# Altium PCB 菠萝万能控V4.0.pcbdoc
Units mil, origin at the board's own origin, x right, y up, seen from the top; angles counter-clockwise.
Board outline 4080.87 x 4159.61 mil, 2 copper layers (Top Layer, Bottom Layer); 8 components, 30 nets, 79 pads, 0 vias.
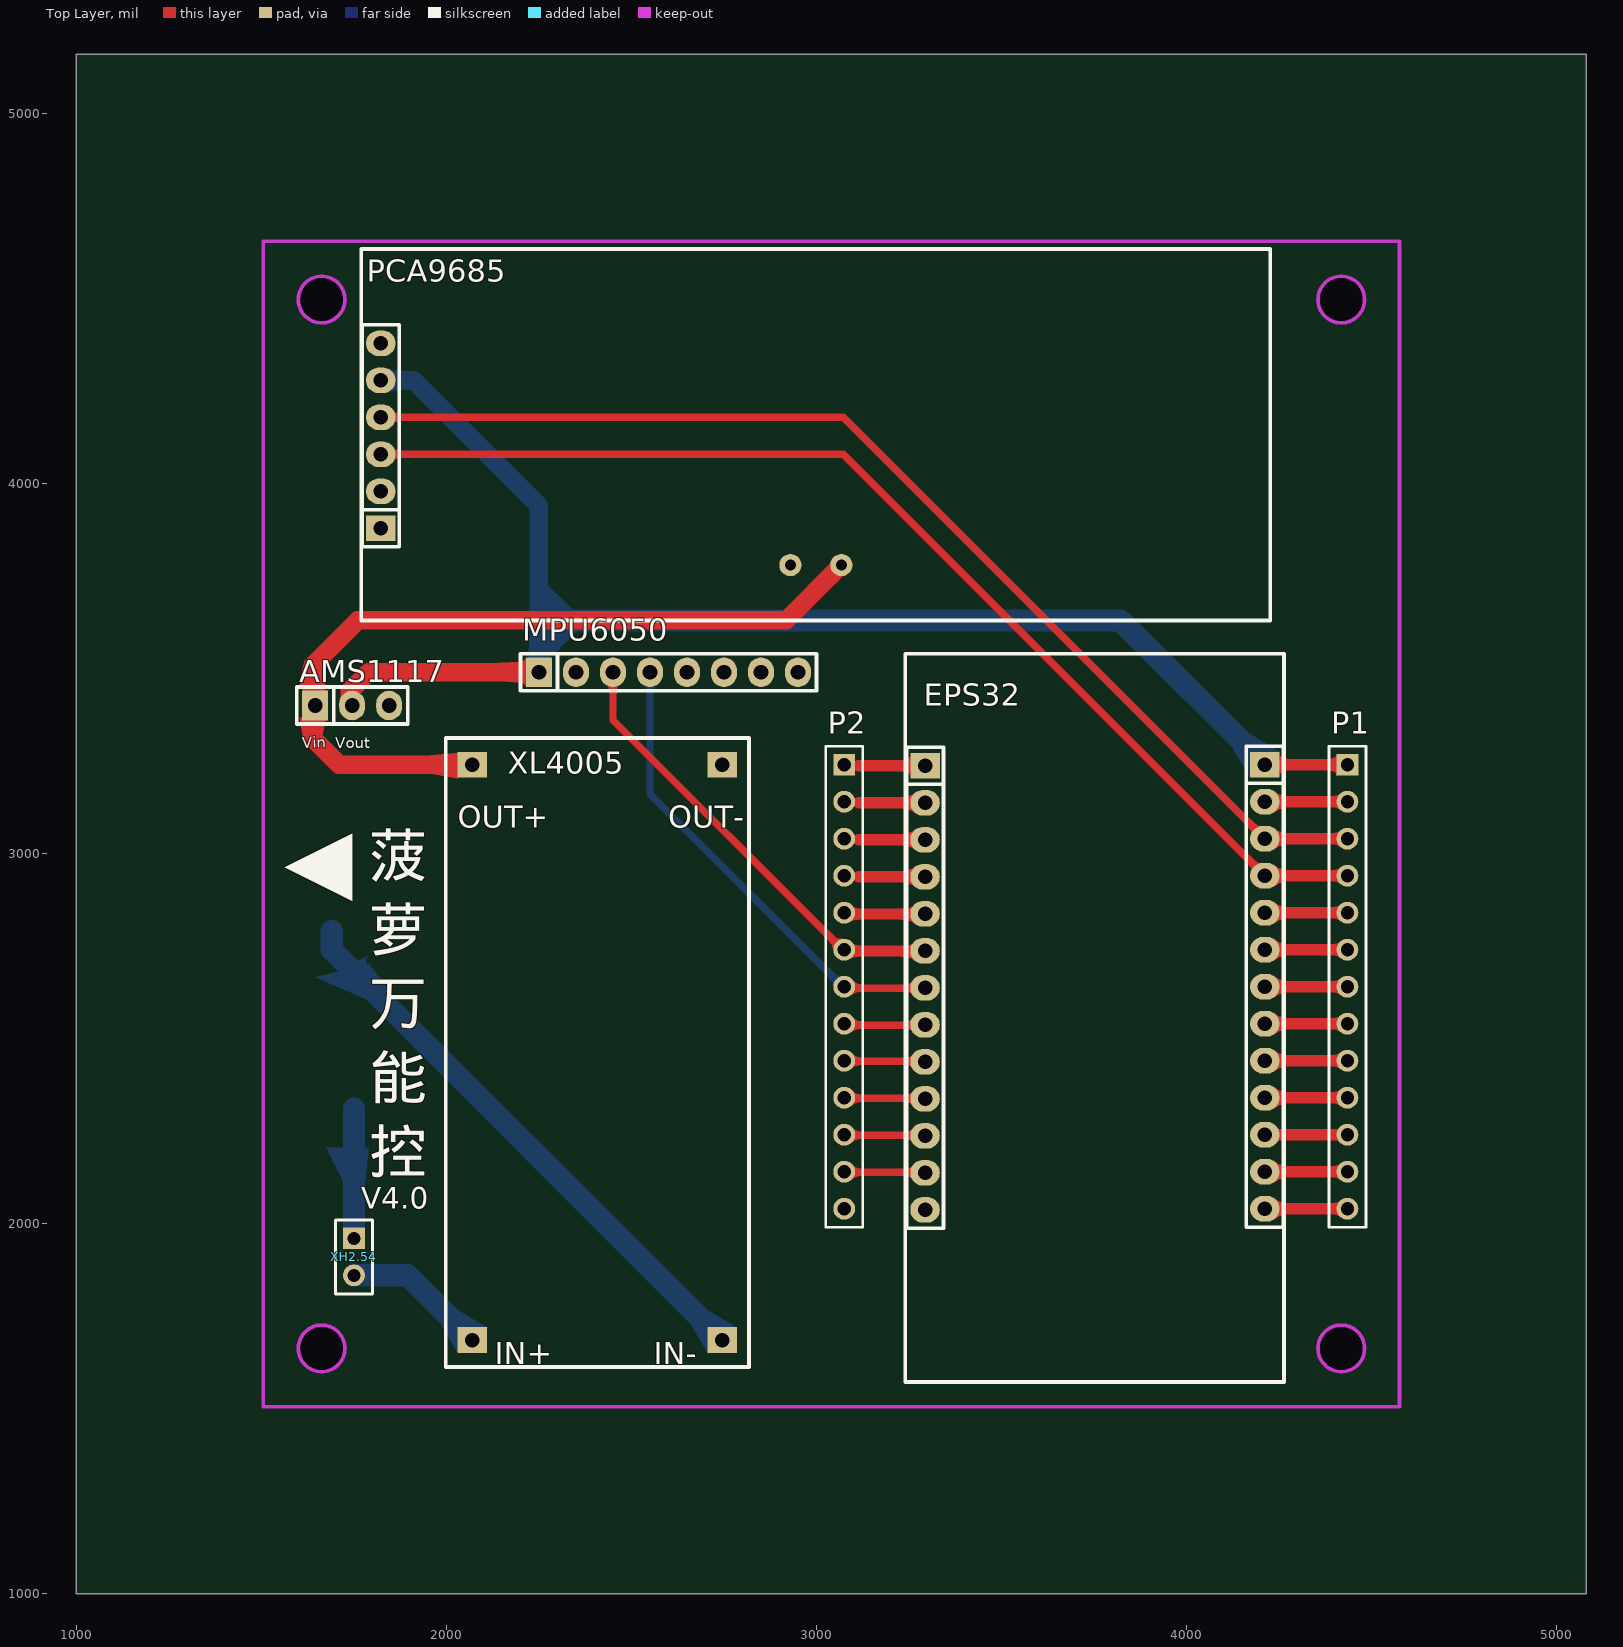
[diagram p0: Top Layer view]
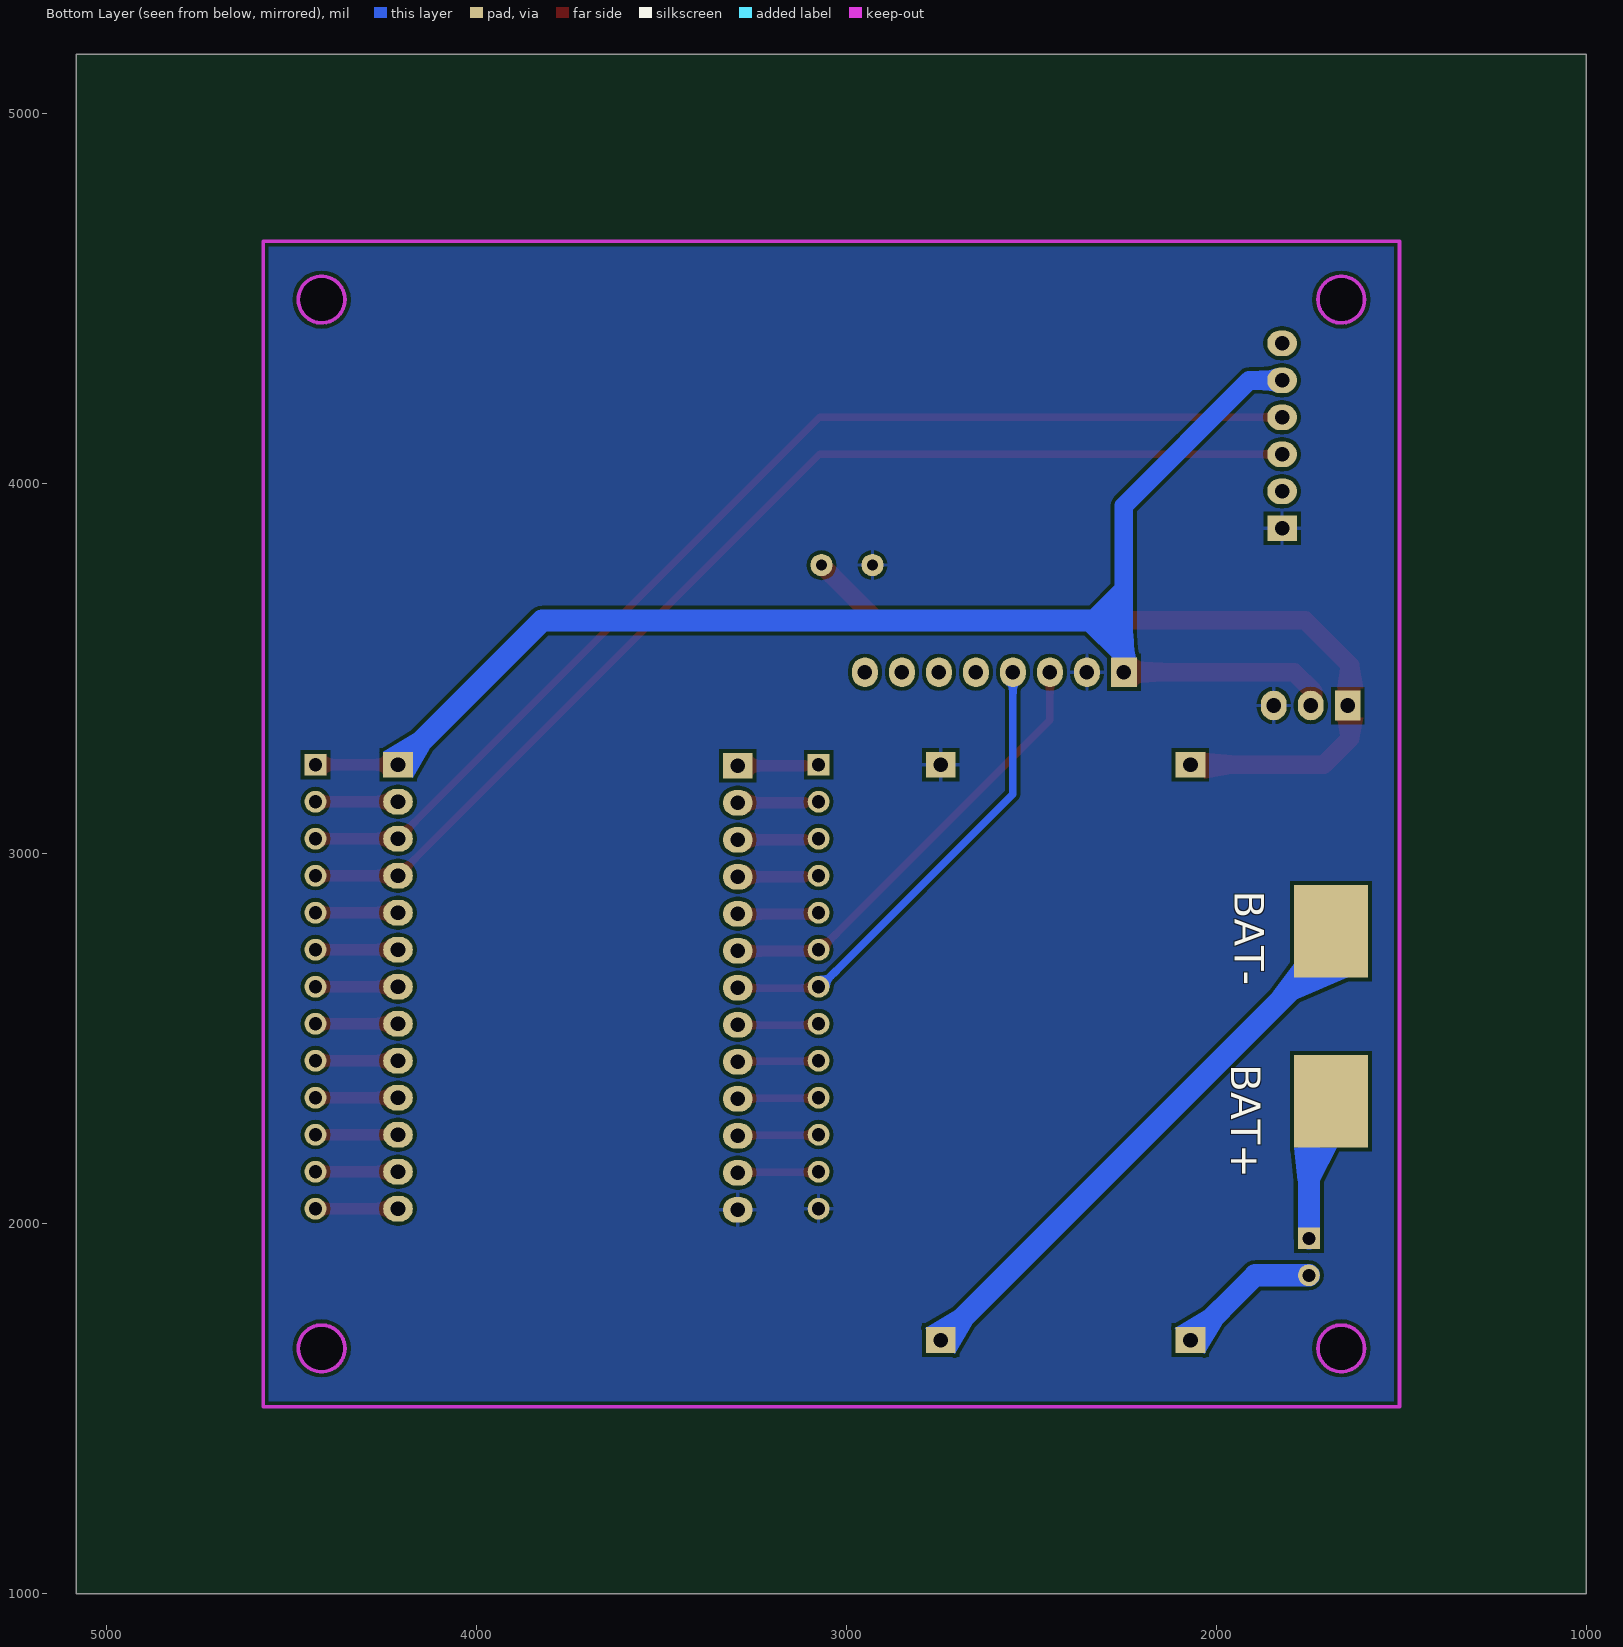
[diagram p1: Bottom Layer view, seen from below]

## Layer stack, top to bottom
Top Solder: solder mask 0.4, Solder Resist, Dk 3.5
Top Layer: signal copper 1.4
Dielectric1: dielectric 12.6, FR-4, Dk 4.8
Bottom Layer: signal copper 1.4
Bottom Solder: solder mask 0.4, Solder Resist, Dk 3.5

## Board outline
5080.87,1000 1000,1000 1000,5159.61 5080.87,5159.61
cut-out: 4418.39,4434.13 4408.53,4434.91 4398.92,4437.22 4389.79,4441 4381.36,4446.16 4373.84,4452.58 4367.42,4460.1 4362.26,4468.53 4358.48,4477.66 4356.17,4487.27 4355.39,4497.13 4356.17,4506.98 4358.48,4516.59 4362.26,4525.72 4367.42,4534.15 4373.84,4541.67 4381.36,4548.09 4389.79,4553.25 4398.92,4557.03 4408.53,4559.34 4418.39,4560.12 4428.24,4559.34 4437.85,4557.03 4446.98,4553.25 4455.41,4548.09 4462.93,4541.67 4469.35,4534.15 4474.51,4525.72 4478.29,4516.59 4480.6,4506.98 4481.38,4497.13 4480.6,4487.27 4478.29,4477.66 4474.51,4468.53 4469.35,4460.1 4462.93,4452.58 4455.41,4446.16 4446.98,4441 4437.85,4437.22 4428.24,4434.91
cut-out: 4355.39,1662.48 4356.17,1652.63 4358.48,1643.01 4362.26,1633.88 4367.42,1625.45 4373.84,1617.94 4381.36,1611.52 4389.79,1606.35 4398.92,1602.57 4408.53,1600.26 4418.39,1599.49 4428.24,1600.26 4437.85,1602.57 4446.98,1606.35 4455.41,1611.52 4462.93,1617.94 4469.35,1625.45 4474.51,1633.88 4478.29,1643.01 4480.6,1652.63 4481.38,1662.48 4480.6,1672.33 4478.29,1681.95 4474.51,1691.08 4469.35,1699.51 4462.93,1707.02 4455.41,1713.44 4446.98,1718.61 4437.85,1722.39 4428.24,1724.7 4418.39,1725.47 4408.53,1724.7 4398.92,1722.39 4389.79,1718.61 4381.36,1713.44 4373.84,1707.02 4367.42,1699.51 4362.26,1691.08 4358.48,1681.95 4356.17,1672.33
cut-out: 1662.48,1599.49 1652.63,1600.26 1643.01,1602.57 1633.88,1606.35 1625.45,1611.52 1617.94,1617.94 1611.52,1625.45 1606.35,1633.88 1602.57,1643.01 1600.26,1652.63 1599.49,1662.48 1600.26,1672.33 1602.57,1681.95 1606.35,1691.08 1611.52,1699.51 1617.94,1707.02 1625.45,1713.44 1633.88,1718.61 1643.01,1722.39 1652.63,1724.7 1662.48,1725.47 1672.33,1724.7 1681.95,1722.39 1691.08,1718.61 1699.51,1713.44 1707.02,1707.02 1713.44,1699.51 1718.61,1691.08 1722.39,1681.95 1724.7,1672.33 1725.47,1662.48 1724.7,1652.63 1722.39,1643.01 1718.61,1633.88 1713.44,1625.45 1707.02,1617.94 1699.51,1611.52 1691.08,1606.35 1681.95,1602.57 1672.33,1600.26
cut-out: 1662.48,4434.13 1652.63,4434.91 1643.01,4437.22 1633.88,4441 1625.45,4446.16 1617.94,4452.58 1611.52,4460.1 1606.35,4468.53 1602.57,4477.66 1600.26,4487.27 1599.49,4497.13 1600.26,4506.98 1602.57,4516.59 1606.35,4525.72 1611.52,4534.15 1617.94,4541.67 1625.45,4548.09 1633.88,4553.25 1643.01,4557.03 1652.63,4559.34 1662.48,4560.12 1672.33,4559.34 1681.95,4557.03 1691.08,4553.25 1699.51,4548.09 1707.02,4541.67 1713.44,4534.15 1718.61,4525.72 1722.39,4516.59 1724.7,4506.98 1725.47,4497.13 1724.7,4487.27 1722.39,4477.66 1718.61,4468.53 1713.44,4460.1 1707.02,4452.58 1699.51,4446.16 1691.08,4441 1681.95,4437.22 1672.33,4434.91

## Design rules (kind name [scope] priority, off if disabled: settings)
Clearance [All] p1: gap=10 ignorepadtopadclearanceinfootprint=FALSE except(0: Arc-Hole Track-Hole SMDPad-Hole THPad-Hole Via-Hole Fill-Hole Poly-Hole Region-Hole Text-Hole)
PolygonConnect [All] p1: connectstyle=Relief reliefconductorwidth=10 reliefentries=4 polygonreliefangle="90 Angle" airgapwidth=10
RoutingVias [All] p1: holewidth=28 width=50 viastyle="Through Hole" minholewidth=28 minwidth=50 maxholewidth=28 maxwidth=50
SilkToSilkClearance [All] p1 off: silktosilkclearance=10
SilkToSolderMaskClearance [IsPad] p1 off: minsilkscreentomaskgap=10 clearancetoexposedcopper=TRUE
SolderMaskExpansion [All] p1: expansion=4
Width [All] p1: maxlimit=60 minlimit=10 preferedwidth=10 minimp=50.000000 maximp=50.000000 favimp=50.000000
28 further rules are at their usual default settings.

## Classes and differential pairs
component class 菠萝万能控V4.0: ams1117 EPS32 MPU6050 P1 P2 PCA9685 XH2.54

## Components (designator, comment, footprint, x,y, rotation, side; value= is the part's Value field where it differs from the comment)
AMS1117 "AMS1117_Moudle" AMS1117_MOUDLE 1591.57,3453.11 r270 top (schematic designator ams1117)
EPS32 "ESP32_Moudle" ESP32_MOUDLE 3240,3540 r270 top
MPU6050 "MPU6050_Moudle" MPU6050_Moudle 2189.02,4061.89 r270 top
P1 "Header 13" HDR1X13 4435,3240 r270 top
P2 "Header 13" HDR1X13 3075,3240 r270 top
PCA9685 "PCA9685_Moudle" PCA9685_Moudle 1770.01,3630 r0 top
XH2.54 "Header 2" HDR1X2 1750,1960 r270 top
XL4005 "XL4005_Moudle" XL4005_Moudle 2817.64,1612.48 r90 top

## Footprints (in the part's own frame and the unit in brackets; to place one, negate y for a bottom-side part, rotate by r counter-clockwise, add the part's x,y. Pads: shape width x height; smd on the part's side, far side on the other; paste and mask are expansions set on the pad)
AMS1117_MOUDLE [mil]
  rect 80x70 hole 39.37: 1(53.11,53.43)
  oval 80x70 hole 39.37: 2(53.11,153.43) 3(53.11,253.43)
  silkscreen extent 3,3 103,303
ESP32_MOUDLE [mil]
  rect 70x80 hole 39.37: 1(300.04,971.89) 14(302.83,53.46)
  oval 70x80 hole 39.37: 2(400.04,971.89) 3(500.04,971.89) 4(600.04,971.89) 5(700.04,971.89) 6(800.04,971.89) 7(900.04,971.89) 8(1000.04,971.89) 9(1100.04,971.89) 10(1200.04,971.89) 11(1300.04,971.89) 12(1400.04,971.89) 13(1500.04,971.89) 15(402.83,53.46) 16(502.83,53.46) 17(602.83,53.46) 18(702.83,53.46) 19(802.83,53.46) 20(902.83,53.46) 21(1002.83,53.46) 22(1102.83,53.46) 23(1202.83,53.46) 24(1302.83,53.46) 25(1402.83,53.46) 26(1502.83,53.46)
  silkscreen extent 0,0 1969,1024
HDR1X2 [mm]
  rect 1.5x1.5 hole 0.9: 1(0,0)
  round 1.5 hole 0.9: 2(2.54,0)
  silkscreen extent -1.27,-1.27 3.81,1.27
HDR1X13 [mm] "Connector; Header; 13 Position"
  rect 1.5x1.5 hole 0.9: 1(0,0)
  round 1.5 hole 0.9: 2(2.54,0) 3(5.08,0) 4(7.62,0) 5(10.16,0) 6(12.7,0) 7(15.24,0) 8(17.78,0) 9(20.32,0) 10(22.86,0) 11(25.4,0) 12(27.94,0) 13(30.48,0)
  silkscreen extent -1.27,-1.27 31.75,1.27
MPU6050_Moudle [mil]
  rect 80x70 hole 39.37: 1(571.89,60.98)
  oval 80x70 hole 39.37: 2(571.89,160.98) 3(571.89,260.98) 4(571.89,360.98) 5(571.89,460.98) 6(571.89,560.98) 7(571.89,660.98) 8(571.89,760.98)
  silkscreen extent 522,11 622,811
PCA9685_Moudle [mil]
  rect 80x70 hole 39.37: 1(52.48,249.06)
  oval 80x70 hole 39.37: 2(52.48,349.06) 3(52.48,449.06) 4(52.48,549.06) 5(52.48,649.06) 6(52.48,749.06)
  round 60 hole 30: 7(1297.24,149.61) 8(1159.45,149.61)
  silkscreen extent 0,0 2457,1004
XL4005_Moudle [mil]
  rect 70x80 hole 39.37: 1(1627.52,747.64) 2(1627.52,72.52) 3(72.52,747.64) 4(72.5,72.52)
  silkscreen extent 0,0 1700,820

## Part data
P1 P2: "Header, 13-Pin", LatestRevisionDate=17-Jul-2002, LatestRevisionNote="Re-released for DXP Platform.", Publisher="Altium Limited"
XH2.54: "Header, 2-Pin", LatestRevisionDate=17-Jul-2002, LatestRevisionNote="Re-released for DXP Platform.", Publisher="Altium Limited"

## Free pads (board coordinates)
  rect 200x250 smd far side: B+(1690,2330) B-(1690,2790)

## Nets (pads, with @x,y where several pads share a name; then routed paths per layer and width w, separated by ;. In a path a pad name is that pad's centre, name@x,y a point inside that pad or via, vN(x,y) a via of type N, cw(c..) or ccw(c..) an arc to the next point about the centre after c; other vN are vias at no path point)
BAT+: pad.B+ XH2.54.1 | length 350
  Bottom Layer w60: XH2.54.1 pad.B+@1750,2310
BAT-: pad.B- XL4005.4 | length 1545.5
  Bottom Layer w60: pad.B- 1690,2739.98 XL4005.4@2747.48,1682.5
GND: AMS1117.3 EPS32.26 MPU6050.2 P2.13 PCA9685.1 PCA9685.8 XL4005.2
MPU-SCL: EPS32.19 MPU6050.3 P2.6 | length 1215.4
  Top Layer w20: MPU6050.3 2450,3360.62 P2.6@3073.46,2737.16
  Top Layer w30: P2.6@3090,2735 3091.08,2736.08 3292.38,2736.08 EPS32.19
MPU-SDA: EPS32.20 MPU6050.4 P2.7 | length 1284
  Top Layer w20: P2.7@3080,2635 3081.08,2636.08 3292.38,2636.08 EPS32.20
  Bottom Layer w20: MPU6050.4 2550,3160.62 P2.7@3073.46,2637.16
NetEPS32_2: EPS32.2 P1.2 | length 223.1
  Top Layer w30: EPS32.2 P1.2
NetEPS32_5: EPS32.5 P1.5 | length 223.1
  Top Layer w30: EPS32.5 P1.5
NetEPS32_6: EPS32.6 P1.6 | length 223.1
  Top Layer w30: EPS32.6 P1.6
NetEPS32_7: EPS32.7 P1.7 | length 223.1
  Top Layer w30: EPS32.7 P1.7
NetEPS32_8: EPS32.8 P1.8 | length 223.1
  Top Layer w30: EPS32.8 P1.8
NetEPS32_9: EPS32.9 P1.9 | length 223.1
  Top Layer w30: EPS32.9 P1.9
NetEPS32_10: EPS32.10 P1.10 | length 223.1
  Top Layer w30: EPS32.10 P1.10
NetEPS32_11: EPS32.11 P1.11 | length 223.1
  Top Layer w30: EPS32.11 P1.11
NetEPS32_12: EPS32.12 P1.12 | length 223.1
  Top Layer w30: EPS32.12 P1.12
NetEPS32_13: EPS32.13 P1.13 | length 223.1
  Top Layer w30: EPS32.13 P1.13
NetEPS32_14: EPS32.14 P2.1 | length 180
  Top Layer w30: 3113.47,3237.17 EPS32.14
NetEPS32_15: EPS32.15 P2.2 | length 180
  Top Layer w30: 3113.47,3137.17 EPS32.15
NetEPS32_16: EPS32.16 P2.3 | length 180
  Top Layer w30: 3113.47,3037.17 EPS32.16
NetEPS32_17: EPS32.17 P2.4 | length 180
  Top Layer w30: 3113.47,2937.17 EPS32.17
NetEPS32_18: EPS32.18 P2.5 | length 204.4
  Top Layer w30: P2.5@3090,2835 3091.08,2836.08 3292.38,2836.08 EPS32.18
NetEPS32_21: EPS32.21 P2.8 | length 214.4
  Top Layer w20: P2.8@3080,2535 3081.08,2536.08 3292.38,2536.08 EPS32.21
NetEPS32_22: EPS32.22 P2.9 | length 219.6
  Top Layer w20: P2.9 3076.42,2438.58 3292.05,2438.58 EPS32.22
NetEPS32_23: EPS32.23 P2.10 | length 219.6
  Top Layer w20: P2.10 3076.42,2338.58 3292.05,2338.58 EPS32.23
NetEPS32_24: EPS32.24 P2.11 | length 219.6
  Top Layer w20: P2.11 3076.42,2238.58 3292.05,2238.58 EPS32.24
NetEPS32_25: EPS32.25 P2.12 | length 219.6
  Top Layer w20: P2.12 3076.42,2138.58 3292.05,2138.58 EPS32.25
NETXH2.54_2: XH2.54.2 XL4005.3 | length 395.9
  Bottom Layer w60: XH2.54.2 1894.88,1860 XL4005.3@2072.36,1682.52
PCA-SCL: EPS32.4 P1.4 PCA9685.3 | length 3088.5
  Top Layer w20: PCA9685.3 3072.79,4079.06 EPS32.4
  Top Layer w30: EPS32.4 4425.02,2939.98 4430,2935 P1.4
PCA-SDA: EPS32.3 P1.3 PCA9685.4 | length 3084.4
  Top Layer w20: PCA9685.4 3072.79,4179.06 EPS32.3
  Top Layer w30: EPS32.3 P1.3
VCC-3.3V: AMS1117.2 EPS32.1 MPU6050.1 P1.1 PCA9685.5 | length 4017.8
  Top Layer w30: EPS32.1 EPS32.1@4212.99,3238.86 ; EPS32.1 P1.1
  Top Layer w50: AMS1117.2@1738.43,3406.89 1738.43,3438.43 1790,3490 MPU6050.1
  Bottom Layer w50: PCA9685.5 1910.94,4279.06 2250,3940 MPU6050.1
  Bottom Layer w60: MPU6050.1 2250,3540 2340,3630 3821.85,3630 EPS32.1
VCC-5V: AMS1117.1 PCA9685.7 XL4005.1 | length 2202.6
  Top Layer w50: XL4005.1@2072.36,3237.52 2069.88,3240 1710,3240 1638.43,3311.57 1638.43,3406.89 1638.43,3508.43 1760,3630 2917.64,3630 PCA9685.7
pads on no net: MPU6050.5 MPU6050.6 MPU6050.7 MPU6050.8 PCA9685.2 PCA9685.6

## Polygon pours and split planes (outlines as drawn)
GND on Bottom Layer (solid, pour order 6): 4575.87,4654.61 1505,4654.61 1505,1505 4575.87,1505
GND on Bottom Layer "Bottom Layer-GND" (solid, pour order 0): 1510,1510 1510,4650 1580,4650 4570,4650 4570,1510 1510,1510

## Keep-outs
Keep-Out Layer:
  lines w10: 1725.47,1662.33 cw(c1662.48,1662.49) 1725.47,1662.48 ; 1725.47,4496.97 cw(c1662.48,4497.13) 1725.47,4497.13 ; 4481.38,1662.33 cw(c4418.39,1662.49) 4481.38,1662.48 ; 4481.38,4496.97 cw(c4418.39,4497.13) 4481.38,4497.13

## Other copper
Top Layer:
  region net MPU-SCL: 2472.15,3470.47 2427.85,3470.47 2440,3449.8 2460,3449.8
  region net VCC-5V: 3037.31,3781.49 3069.13,3749.67 3056.05,3733.05 3020.69,3768.41
  region net VCC-3.3V: 2220.47,3460.47 2220.47,3519.53 2145.47,3515 2145.47,3465
  region net VCC-5V: 2032.36,3202.52 2032.36,3272.52 1957.36,3265 1957.36,3215
  region net MPU-SCL: 3039.57,2756.92 3055.77,2769.78 3033.98,2790.79 3018.21,2778.27
  region net PCA-SDA: 4178,3059.72 4194.19,3072.58 4172.41,3093.59 4156.64,3081.07
  region net PCA-SCL: 4178,2959.72 4194.19,2972.58 4172.41,2993.59 4156.64,2981.07
  region net VCC-5V: 1603.42,3446.89 1673.42,3446.89 1663.43,3508.43 1613.43,3508.43
  region net VCC-5V: 1673.42,3366.89 1603.42,3366.89 1613.43,3311.57 1663.43,3311.57
  region net PCA-SCL: 1860.77,4089.87 1860.77,4068.24 1890.77,4069.06 1890.77,4089.06
  region net PCA-SDA: 1860.77,4189.87 1860.77,4168.24 1890.77,4169.06 1890.77,4189.06
Bottom Layer:
  region net MPU-SDA: 2572.15,3470.47 2527.85,3470.47 2540,3449.8 2560,3449.8
  region net BAT+: 1790,2205 1675,2205 1720,2115 1780,2115
  region net BAT-: 1790,2702.48 1644.76,2665 1780.48,2607.08 1847.92,2624.48
  region net VCC-3.3V: 2220.47,3519.53 2279.53,3519.53 2275,3594.53 2225,3594.53
  region net NETXH2.54_2: 2032.36,1647.52 2112.36,1717.52 2031.21,1766.1 1985.95,1726.5
  region net BAT-: 2707.48,1647.5 2787.48,1717.5 2706.33,1766.08 2661.07,1726.48
  region net MPU-SDA: 3039.57,2656.92 3055.77,2669.78 3033.98,2690.79 3018.21,2678.27
  region net VCC-3.3V: 4171.89,3204.96 4251.89,3274.96 4170.74,3323.54 4125.48,3283.94
  region net VCC-3.3V: 1851.87,4304.15 1851.87,4253.96 1910.94,4254.06 1910.94,4304.06
  region net VCC-3.3V: 2250,3540 2340,3630 2340,3660 2250,3750 2250,3580

## Silkscreen, mask and mechanical layers (free items; w line width, h text height)
Top Overlay:
  text "Vin" at 1610.52,3285.01 h30 r2
  text "Vout" at 1700,3285 h30
  text "XL4005" at 2165,3215 h60
  text "OUT+" at 2030,3070 h60
  text "OUT-" at 2600,3070 h60
  text "▲" at 1775,2870 h300 r90
  text "菠 / 萝 / 万 / 能 / 控" at 1790,2100 h200
  text "V4.0" at 1770,2020 h100
  text "IN+" at 2130,1620 h60
  text "IN-" at 2560,1620 h60
Bottom Overlay:
  text "BAT-" at 1950,2900 h80 r90
  text "BAT+" at 1960,2430 h80 r90
Document:
  lines w0.1: 3039.43,3078.8 3041.43,3080.8